# EAGLE board Sumobot (EAGLE 9.2.1)
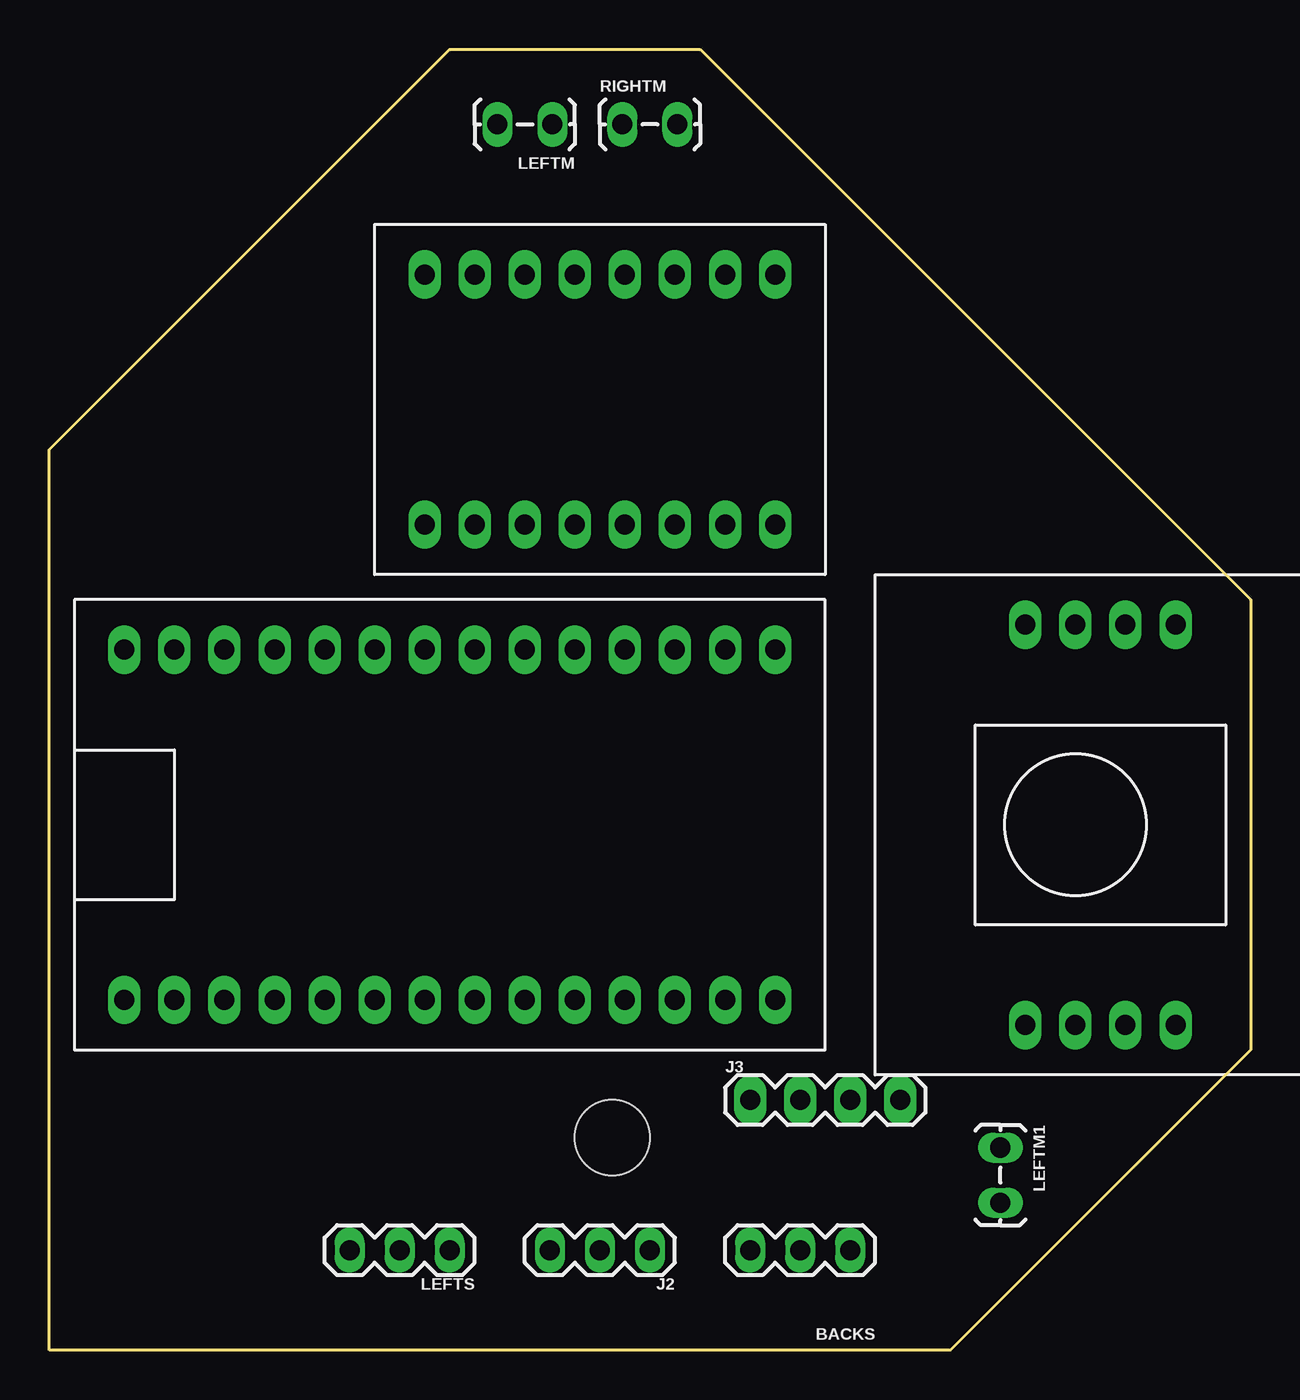
[diagram p0: board, top side]
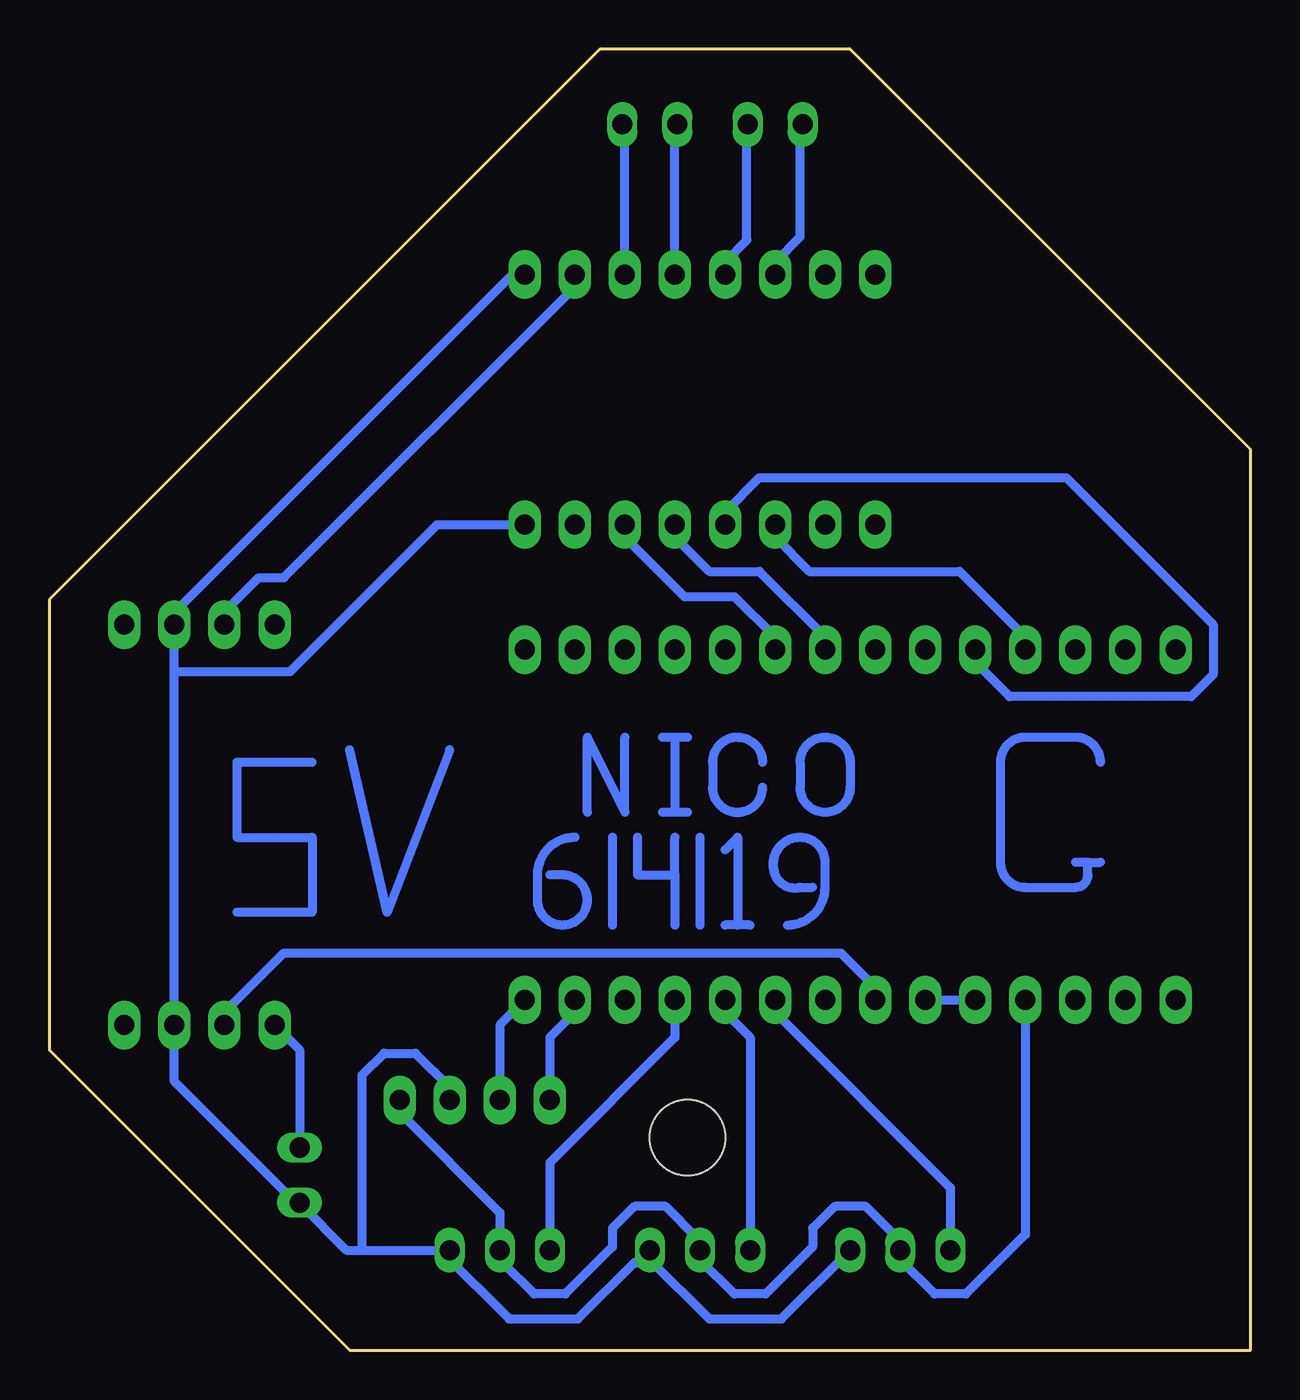
[diagram p1: board, bottom side, seen from below]

Size 60.96 x 66.04 mm. Coordinates in mm from the lower left corner, seen from the top.
Outline: 0,0 0,45.72 20.32,66.04 33.02,66.04 60.96,38.1 60.96,15.24 45.72,0 0,0
Copper layers (1*16): Top 0.035mm / dielectric 1.5mm / Bottom 0.035mm
Design rules "OthermillDRC_1_32_v2 *": minimum track width 18mil, minimum drill 0.8mm, track to track 0.794003125mm, track to pad 0.794003125mm, pad to pad 0.794003125mm, via to via 0.794003125mm, smd to smd 0mil, copper to edge 0mil, drill to drill 1mil, minimum pad ring 10mil, minimum via ring 10mil, stop-mask expansion 1mil, vias tented up to drill 30mil, thermal gap 10mil
Holes 3.81 mm at 28.57,10.79

## Footprints (pad centres in the part's own frame; a part is rotated, then mirrored left to right if it is on the bottom)
1X03 = drill 1.016 long: 1 0,0; 2 2.54,0; 3 5.08,0
1X04 = drill 1.016 pad 1.651 long: 1 0,0; 2 2.54,0; 3 5.08,0; 4 7.62,0
1X02_LOCK_LONGPADS = drill 1.016 long: 1 -0.127,0; 2 2.667,0
METROMINI = drill 1.016 pad 1.651 long: 0 17.78,7.62; 1 15.24,7.62; 2 12.7,7.62; 3 10.16,7.62; 3V -10.16,-10.16; 4 7.62,7.62; 5 5.08,7.62; 5V -7.62,-10.16; 6 2.54,7.62; 7 0,7.62; 8 -2.54,7.62; 9 -5.08,7.62; 10 -7.62,7.62; 11 -10.16,7.62; 12 -12.7,7.62; 13 -15.24,7.62; A0 5.08,-10.16; A1 7.62,-10.16; A2 10.16,-10.16; A3 12.7,-10.16; A4 15.24,-10.16; A5 17.78,-10.16; AREF 2.54,-10.16; GND -5.08,-10.16; GND@1 -2.54,-10.16; RST -12.7,-10.16; USB -15.24,-10.16; VIN 0,-10.16
MOTORDRIVER = drill 1.016 pad 1.651 long: A1IN -5.08,-7.62; A1OUT -2.54,5.08; A2IN -2.54,-7.62; A2OUT -5.08,5.08; AISEN -7.62,5.08; B1IN 2.54,-7.62; B1OUT 2.54,5.08; B2IN 0,-7.62; B2OUT 0,5.08; BISEN -10.16,5.08; FLT -10.16,-7.62; GND 7.62,5.08; GND@1 7.62,-7.62; SLP -7.62,-7.62; VIN 5.08,5.08; VMM 5.08,-7.62
SPSWITCH = drill 1.016 pad 1.651 long: G 0,10.16; G@1 0,-10.16; IN 5.08,10.16; IN@1 5.08,-10.16; OFF -2.54,10.16; OFF@1 -2.54,-10.16; OUT 2.54,10.16; OUT@1 2.54,-10.16

## Placement (x,y rotation side)
BACKS  [1X03]  40.64,5.08 180 top
J2  [1X03]  30.48,5.08 180 top
J3  [1X04]  35.56,12.7 0 top
LEFTM  [1X02_LOCK_LONGPADS]  25.4,62.23 180 top
LEFTM1  [1X02_LOCK_LONGPADS]  48.26,10.16 270 top
LEFTS  [1X03]  20.32,5.08 180 top
METROMINI  METROMINI  [METROMINI]  19.05,27.94 0 top
MOTORDRIVER  [MOTORDRIVER]  29.21,49.53 0 top
RIGHTM  [1X02_LOCK_LONGPADS]  29.21,62.23 0 top
SPSWITCH]  SPSWITCH  [SPSWITCH]  54.61,26.67 180 top

## Library data of the parts
BACKS J2 LEFTS = Nico's Library
J3 = Sumobot; PROD_ID: CONN-09696
LEFTM LEFTM1 RIGHTM = SparkFun-Connectors
METROMINI MOTORDRIVER SPSWITCH] = Sumobot

## Nets
+5V: BACKS.2 J2.2 J3.4 LEFTS.2 METROMINI.5V
GND: BACKS.1 J2.1 J3.3 LEFTM1.2 LEFTS.1 MOTORDRIVER.GND MOTORDRIVER.GND@1 SPSWITCH].G SPSWITCH].G@1
N$1: METROMINI.10 MOTORDRIVER.A1IN
N$2: METROMINI.9 MOTORDRIVER.A2IN
N$3: METROMINI.6 MOTORDRIVER.B2IN
N$4: METROMINI.5 MOTORDRIVER.B1IN
N$5: METROMINI.VIN SPSWITCH].OUT
N$6: MOTORDRIVER.VIN SPSWITCH].OUT@1
N$7: MOTORDRIVER.B1OUT RIGHTM.2
N$8: MOTORDRIVER.B2OUT RIGHTM.1
N$9: LEFTM.1 MOTORDRIVER.A1OUT
N$10: LEFTM.2 MOTORDRIVER.A2OUT
N$11: BACKS.3 METROMINI.A2
N$12: J2.3 METROMINI.A1
N$13: LEFTS.3 METROMINI.A0
N$14: J3.1 METROMINI.A4
N$15: J3.2 METROMINI.A5
N$16: METROMINI.GND METROMINI.GND@1
VCC: LEFTM1.1 SPSWITCH].IN

## Tracks (layer width: path | path; a pad name or v marks a point on that pad's centre or on a via)
+5V
  Bottom 0.457: J3.4 43.18,12.06 38.1,6.99 BACKS.2 37.94,4.92 37.94,4.45 36.35,2.86 34.77,2.86 32.38,5.24 32.38,6.19 31.27,7.3 29.69,7.3 28.1,5.71 28.1,5.24 J2.2 27.94,4.6 26.19,2.86 24.61,2.86 22.23,5.24 22.23,6.19 21.11,7.3 19.53,7.3 17.94,5.71 17.94,5.24 LEFTS.2 17.78,4.6 16.03,2.86 14.45,2.86 11.43,5.87 METROMINI.5V
GND
  Bottom 0.457: LEFTS.1 23.81,1.59 27.46,1.59 30.48,4.6 J2.1 30.64,4.45 31.27,4.45 34.13,1.59 37.62,1.59 40.96,4.92 BACKS.1 45.09,5.08 | 45.09,5.08 45.88,5.08 48.26,7.46 LEFTM1.2 48.42,7.46 54.61,13.65 SPSWITCH].G 54.61,34.45 | J3.3 40.64,13.34 42.39,15.08 43.97,15.08 45.09,13.97 45.09,5.08 | 54.61,34.45 SPSWITCH].G@1 54.45,36.99 54.45,37.62 37.47,54.61 MOTORDRIVER.GND | MOTORDRIVER.GND@1 41.27,41.91 48.74,34.45 54.61,34.45
N$1
  Bottom 0.457: METROMINI.10 11.43,36.2 14.76,39.53 22.38,39.53 24.13,41.27 MOTORDRIVER.A1IN
N$2
  Bottom 0.457: METROMINI.9 13.97,34.92 12.22,33.18 3.02,33.18 1.91,34.29 1.91,36.83 9.37,44.29 24.92,44.29 26.67,42.55 MOTORDRIVER.A2IN
N$3
  Bottom 0.457: METROMINI.6 21.59,36.2 24.92,39.53 27.46,39.53 29.21,41.27 MOTORDRIVER.B2IN
N$4
  Bottom 0.457: METROMINI.5 24.13,36.2 26.19,38.26 28.73,38.26 31.75,41.27 MOTORDRIVER.B1IN
N$5
  Bottom 0.457: METROMINI.VIN 19.05,18.41 20.8,20.16 49.05,20.16 52.07,17.14 SPSWITCH].OUT
N$6
  Bottom 0.457: MOTORDRIVER.VIN 34.29,53.98 49.05,39.21 50.32,39.21 52.07,37.47 SPSWITCH].OUT@1
N$7
  Bottom 0.457: MOTORDRIVER.B1OUT 31.75,62.23 RIGHTM.2
N$8
  Bottom 0.457: MOTORDRIVER.B2OUT 29.21,62.23 RIGHTM.1
N$9
  Bottom 0.457: MOTORDRIVER.A1OUT 26.67,55.24 25.56,56.36 25.56,62.23 LEFTM.1
N$10
  Bottom 0.457: MOTORDRIVER.A2OUT 24.13,55.24 22.86,56.52 22.86,62.23 LEFTM.2
N$11
  Bottom 0.457: BACKS.3 35.56,9.53 29.21,15.88 METROMINI.A2
N$12
  Bottom 0.457: J2.3 25.4,15.88 26.67,17.14 METROMINI.A1
N$13
  Bottom 0.457: LEFTS.3 15.24,8.26 24.13,17.14 METROMINI.A0
N$14
  Bottom 0.457: J3.1 35.56,15.88 34.29,17.14 METROMINI.A4
N$15
  Bottom 0.457: J3.2 38.1,16.51 METROMINI.A5
N$16
  Bottom 0.457: METROMINI.GND@1 METROMINI.GND
N$17
  Bottom 0.457: 40.64,30.48 43.81,22.23 45.72,30.48
N$18
  Bottom 0.457: 47.62,29.84 51.44,29.84 51.44,26.04 47.62,26.04 47.62,22.23 51.44,22.23
N$19
  Bottom 0.457: 7.62,29.84 arc-90 8.89,31.11 11.43,31.11 arc-90 12.7,29.84 12.7,24.77 arc-90 11.43,23.5 8.89,23.5 arc-90 8.26,24.13 8.26,24.77 | 8.26,24.77 7.62,24.77 | 8.26,24.77 8.89,24.77
N$20
  Bottom 0.457: 33.66,27.3 33.66,31.11 31.75,27.3 31.75,31.11
N$21
  Bottom 0.457: 28.57,31.11 29.21,31.11 | 29.21,31.11 29.84,31.11 | 28.57,27.3 29.21,27.3 | 29.21,27.3 29.84,27.3 | 29.21,31.11 29.21,27.3
N$22
  Bottom 0.457: 34.29,26.04 arc-90 36.2,24.13 36.2,22.86 arc-90 34.92,21.59 arc-90 33.66,22.86 arc-90 34.92,24.13 35.56,24.13
N$23
  Bottom 0.457: 24.77,29.84 arc-90 26.04,31.11 arc-90 27.3,29.84 27.3,28.57 arc-90 26.04,27.3 arc-90 24.77,28.57
N$24
  Bottom 0.457: 22.86,29.84 arc90 21.59,31.11 arc90 20.32,29.84 20.32,28.57 arc90 21.59,27.3 arc90 22.86,28.57 22.86,29.84
N$25
  Bottom 0.457: 32.38,26.04 32.38,21.59
N$26
  Bottom 0.457: 31.11,26.04 31.11,24.13 29.21,24.13 | 29.21,24.13 29.21,26.04 | 29.21,24.13 29.21,21.59
N$27
  Bottom 0.457: 27.94,26.04 27.94,21.59
N$28
  Bottom 0.457: 26.67,25.4 26.04,26.04 26.04,21.59 | 25.4,21.59 26.04,21.59 | 26.04,21.59 26.67,21.59
N$29
  Bottom 0.457: 23.5,21.59 arc-90 21.59,23.5 21.59,24.77 arc-90 22.86,26.04 arc-113 24.13,24.13 arc-82 22.86,23.5 22.23,23.5
VCC
  Bottom 0.457: LEFTM1.1 48.26,15.24 SPSWITCH].IN